# Allegro board DAY7_0.brd
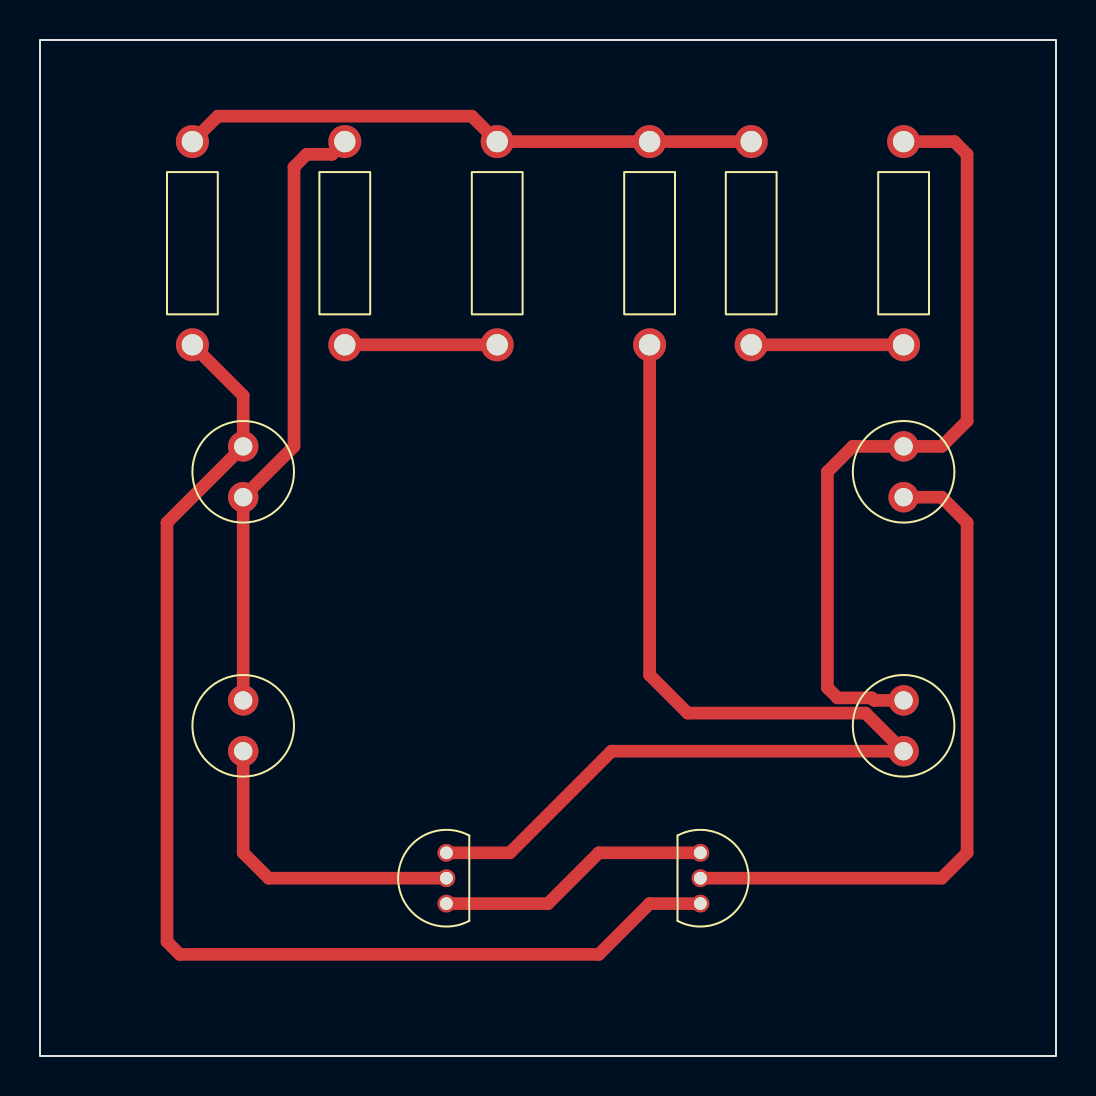
[diagram p0: board, top side]
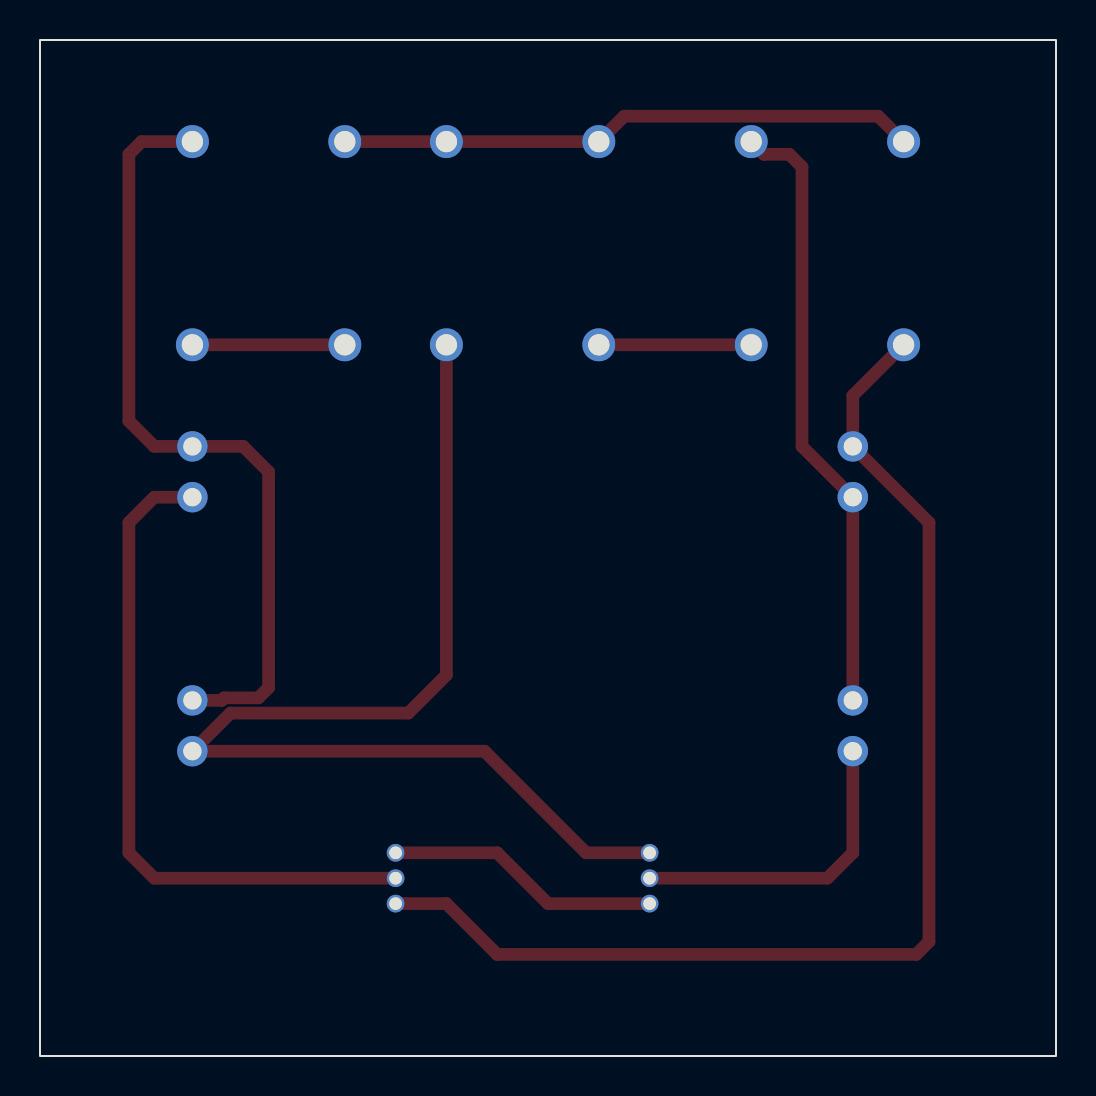
[diagram p1: board, bottom side, seen from below]

Outline 50.8 x 50.8 mm; copper layers: TOP, BOTTOM. Coordinates in mm from the lower left corner of the outline.
Outline path: rectangle 0,0 50.8,50.8

## Placement (name value [footprint] x y rotation side)
C1  CAP POL  [CAP196]  43.18 17.78 180 top
C2  CAP POL  [CAP196]  10.16 27.94 0 top
D1  LED  [CAP196]  43.18 27.94 0 top
D2  LED  [CAP196]  10.16 15.24 0 top
Q1  NPN ECB  [TO92]  33.02 10.16 0 top
Q2  NPN ECB  [TO92]  20.32 7.62 180 top
R1  R  [RES400]  43.18 35.56 0 top
R2  R  [RES400]  30.48 45.72 180 top
R3  R  [RES400]  7.62 45.72 180 top
R4  R  [RES400]  15.24 35.56 0 top
R5  R  [RES400]  35.56 45.72 180 top
R6  R  [RES400]  22.86 35.56 0 top

## Library data of the parts
C1 C2 = CAP POL: Tolerance: ***; User Part Number: ***
D1 D2 = LED: Tolerance: ***; User Part Number: ***
Q1 Q2 = NPN ECB
R1-R6 = R: Tolerance: ***; User Part Number: ***

## Footprints (pads in the part's own frame, mm; a bottom-side part is the same pattern mirrored in y, then rotated)
CAP196
  round 1.524 hole 0.914: 1(0,0) 2(0,2.54)
RES400
  round 1.651 hole 1.067: 1(0,0) 2(0,10.16)
TO92
  round 0.889 hole 0.635: 1(0,0) 2(0,-1.27) 3(0,-2.54)

## Nets
GND: Q1.1(E) Q2.1(E)
VCC: R2.1 R3.1 R5.1 R6.2
N00244: R1.1 R5.2
N00253: R4.1 R6.1
N00290: C2.2 Q1.3(B) R3.2
N00297: C2.1 D2.2(ANODE) R4.2
N00304: C1.1 D1.2(ANODE) R1.2
N00327: D2.1(CATHODE) Q2.2(C)
N00331: D1.1(CATHODE) Q1.2(C)
N00407: C1.2 Q2.3(B) R2.2

## Routing (per net, layer and track width the routed paths; a pad name or vN(x,y) marks a point on that pad's centre or on a via; arc(x,y) is an arc through that point)
GND: length 13.8
  TOP w0.635: Q2.1 25.4,7.62 27.94,10.16 Q1.1
VCC: length 29
  TOP w0.635: R5.1 R2.1 R6.2 21.59,46.99 8.89,46.99 R3.1
N00244: length 7.6
  TOP w0.635: R5.2 R1.1
N00253: length 7.6
  TOP w0.635: R4.1 R6.1
N00290: length 60.5
  TOP w0.635: Q1.3 30.48,7.62 27.94,5.08 6.99,5.08 6.35,5.71 6.35,26.67 C2.2 10.16,33.02 R3.2
N00297: length 30.8
  TOP w0.635: D2.2 C2.1 12.7,30.48 12.7,44.45 13.34,45.09 14.61,45.09 R4.2
N00304: length 39.7
  TOP w0.635: R1.2 45.72,45.72 46.35,45.09 46.35,31.75 45.09,30.48 D1.2 40.64,30.48 39.37,29.21 39.37,18.41 39.88,17.91 41.59,17.91 41.72,17.78 C1.1
N00327: length 15.8
  TOP w0.635: Q2.2 11.43,8.89 10.16,10.16 D2.1
N00331: length 34.1
  TOP w0.635: Q1.2 45.09,8.89 46.35,10.16 46.35,26.67 45.09,27.94 D1.1
N00407: length 55.8
  TOP w0.635: Q2.3 23.5,10.16 28.57,15.24 C1.2 41.27,17.14 32.38,17.14 30.48,19.05 R2.2

## Text on the board
PAGE_OUTLINE: Jang Taehee
